# Altium PCB DI_FM.PcbDoc
Units mm, origin at the board's own origin, x right, y up, seen from the top; angles counter-clockwise.
Board outline 51.3 x 49.3 mm, 4 copper layers (Top Layer, GND, Signals, Bottom Layer), stack 0.603 mm thick; 38 components, 42 nets, 242 pads, 34 vias.
Unrouted connection lines stored in the file: 77.
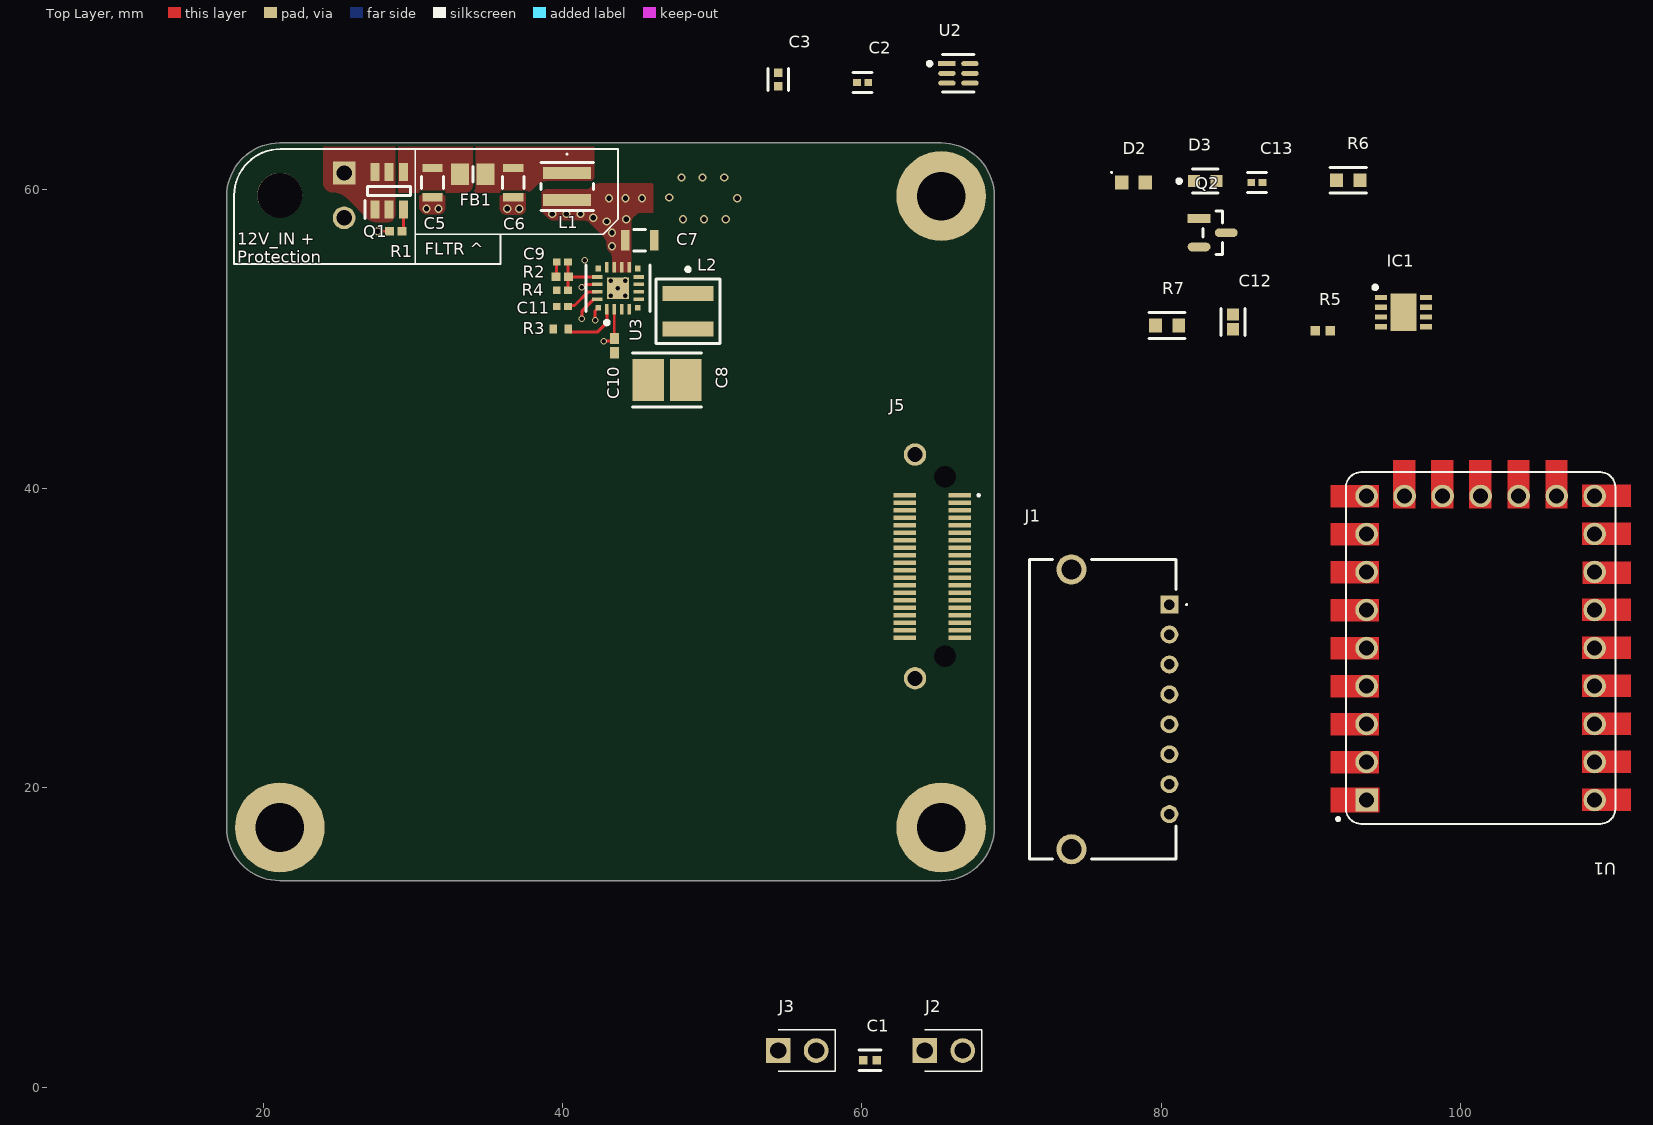
[diagram p0: Top Layer view]
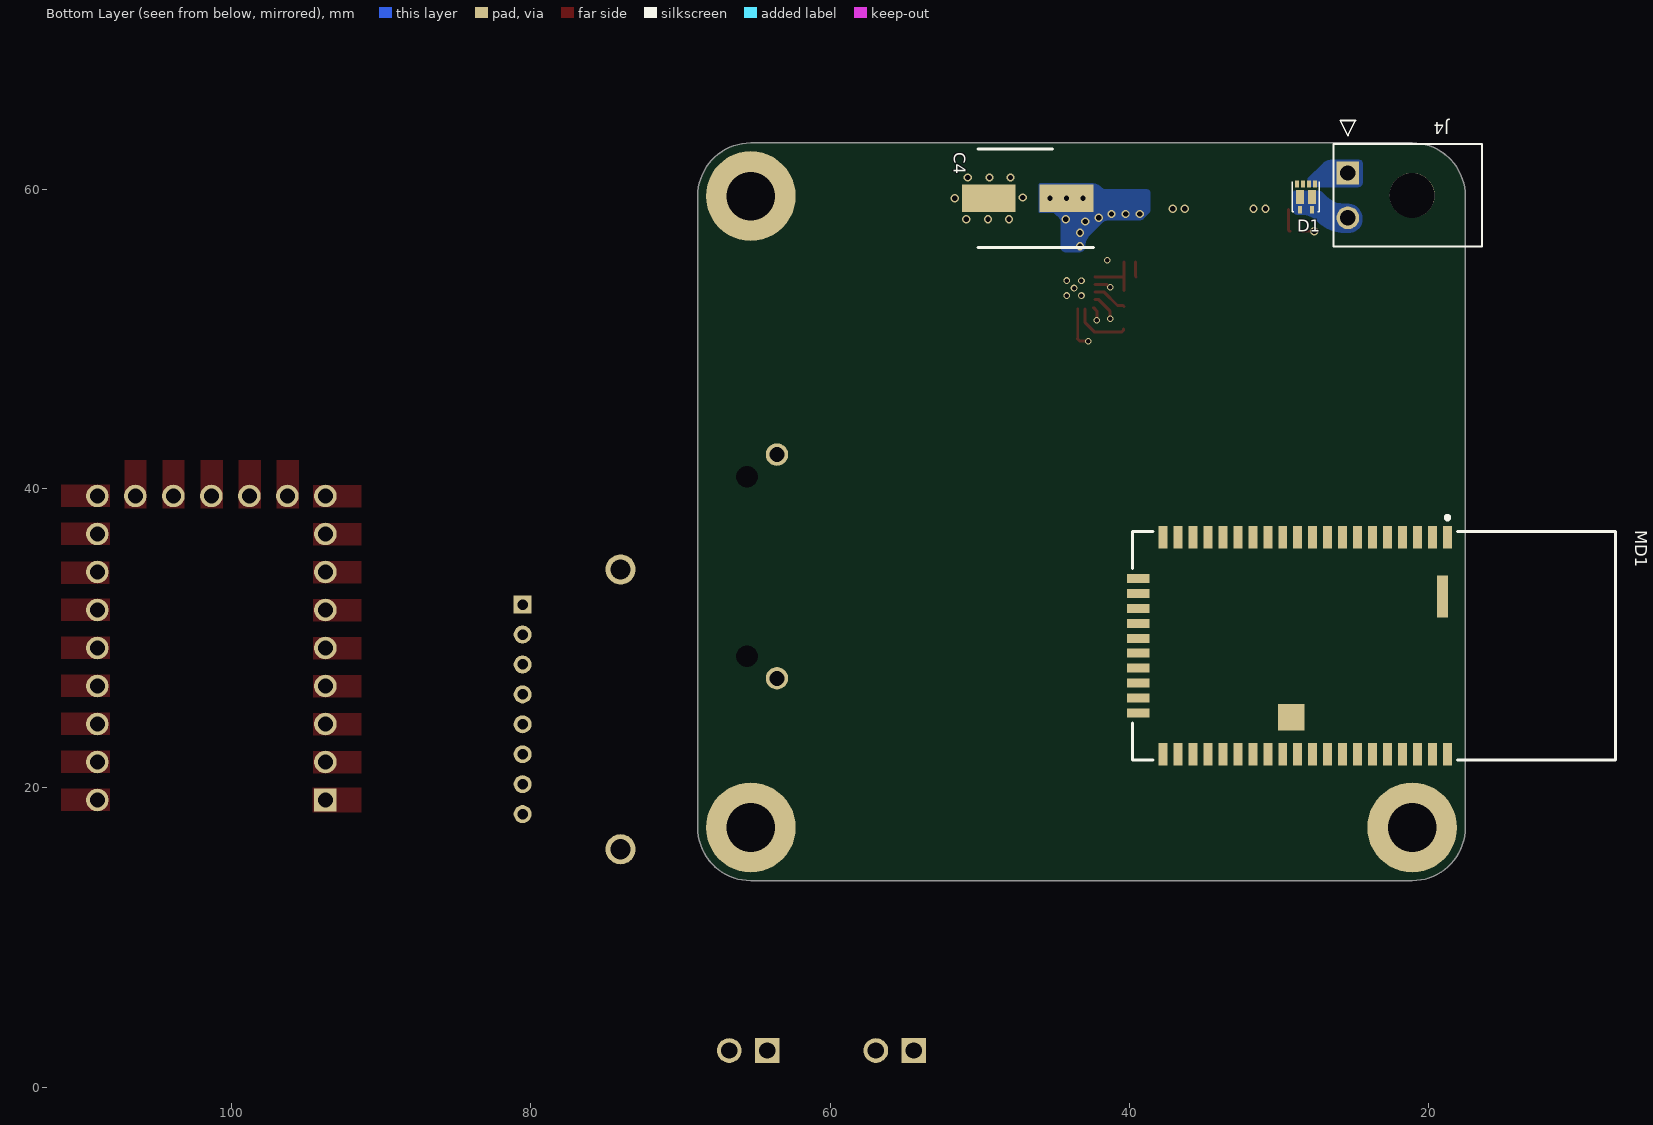
[diagram p1: Bottom Layer view, seen from below]
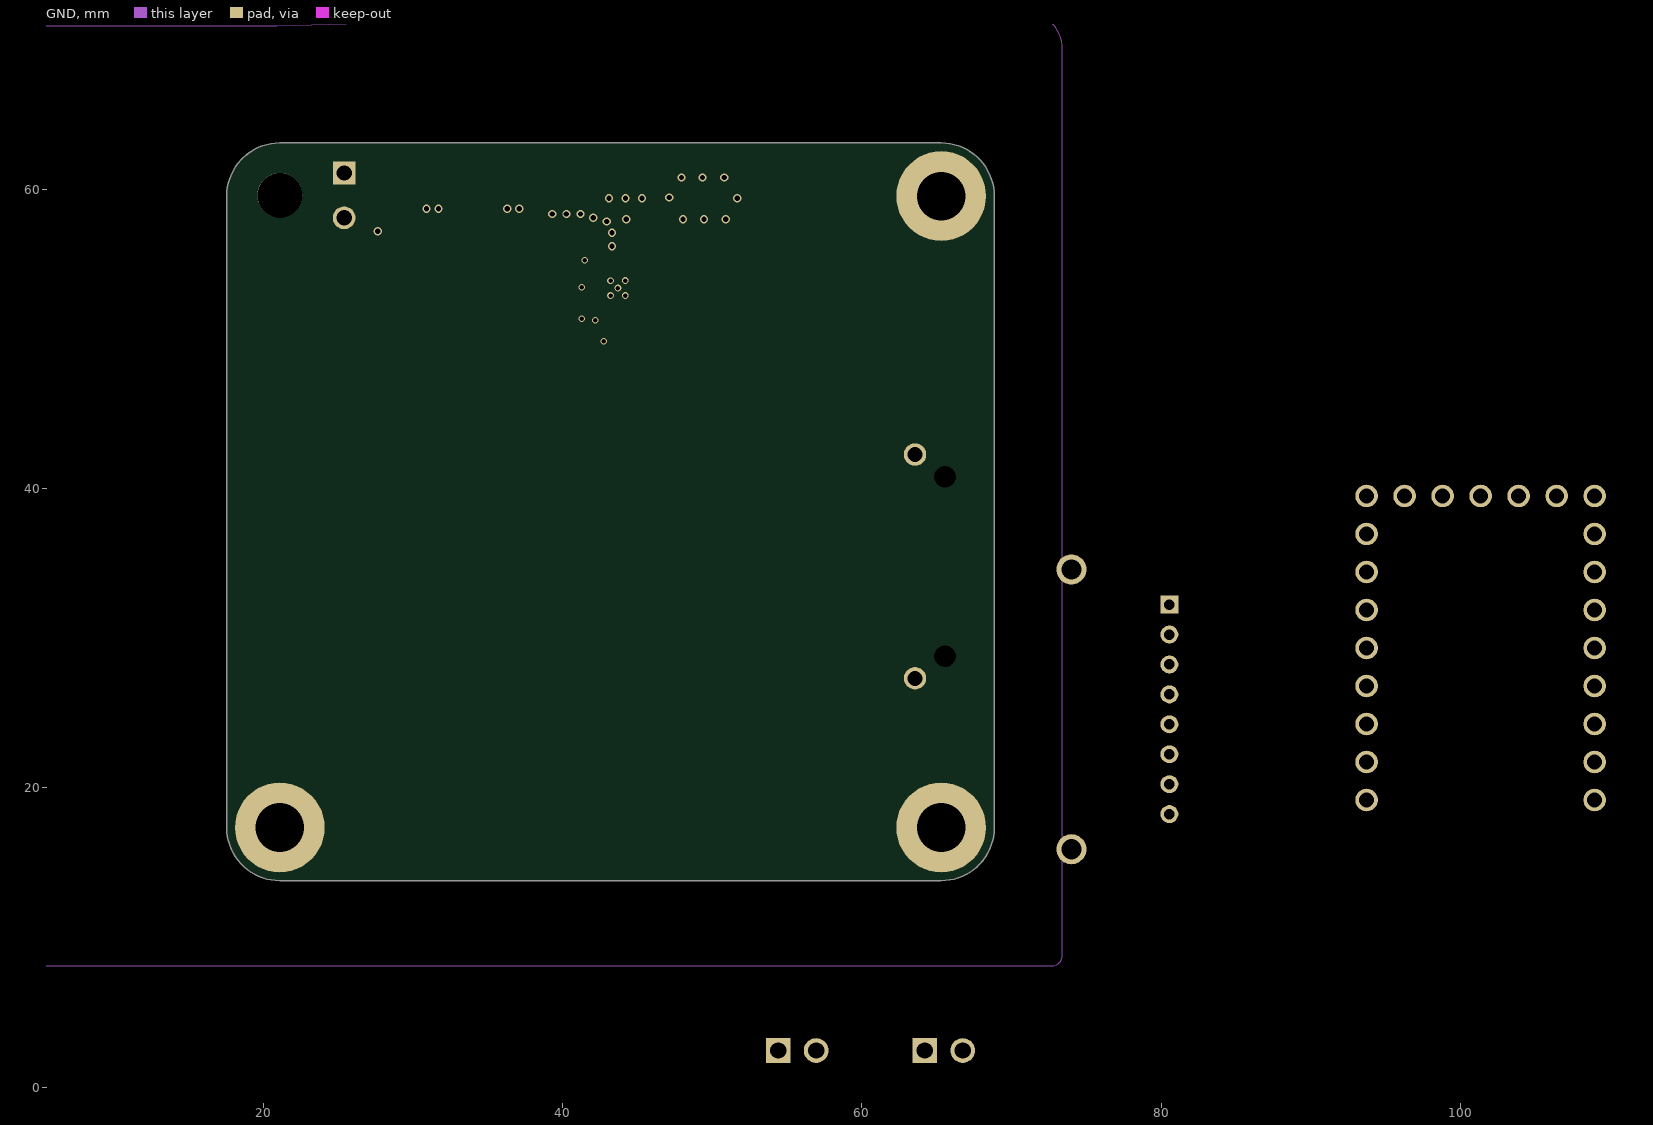
[diagram p2: GND]
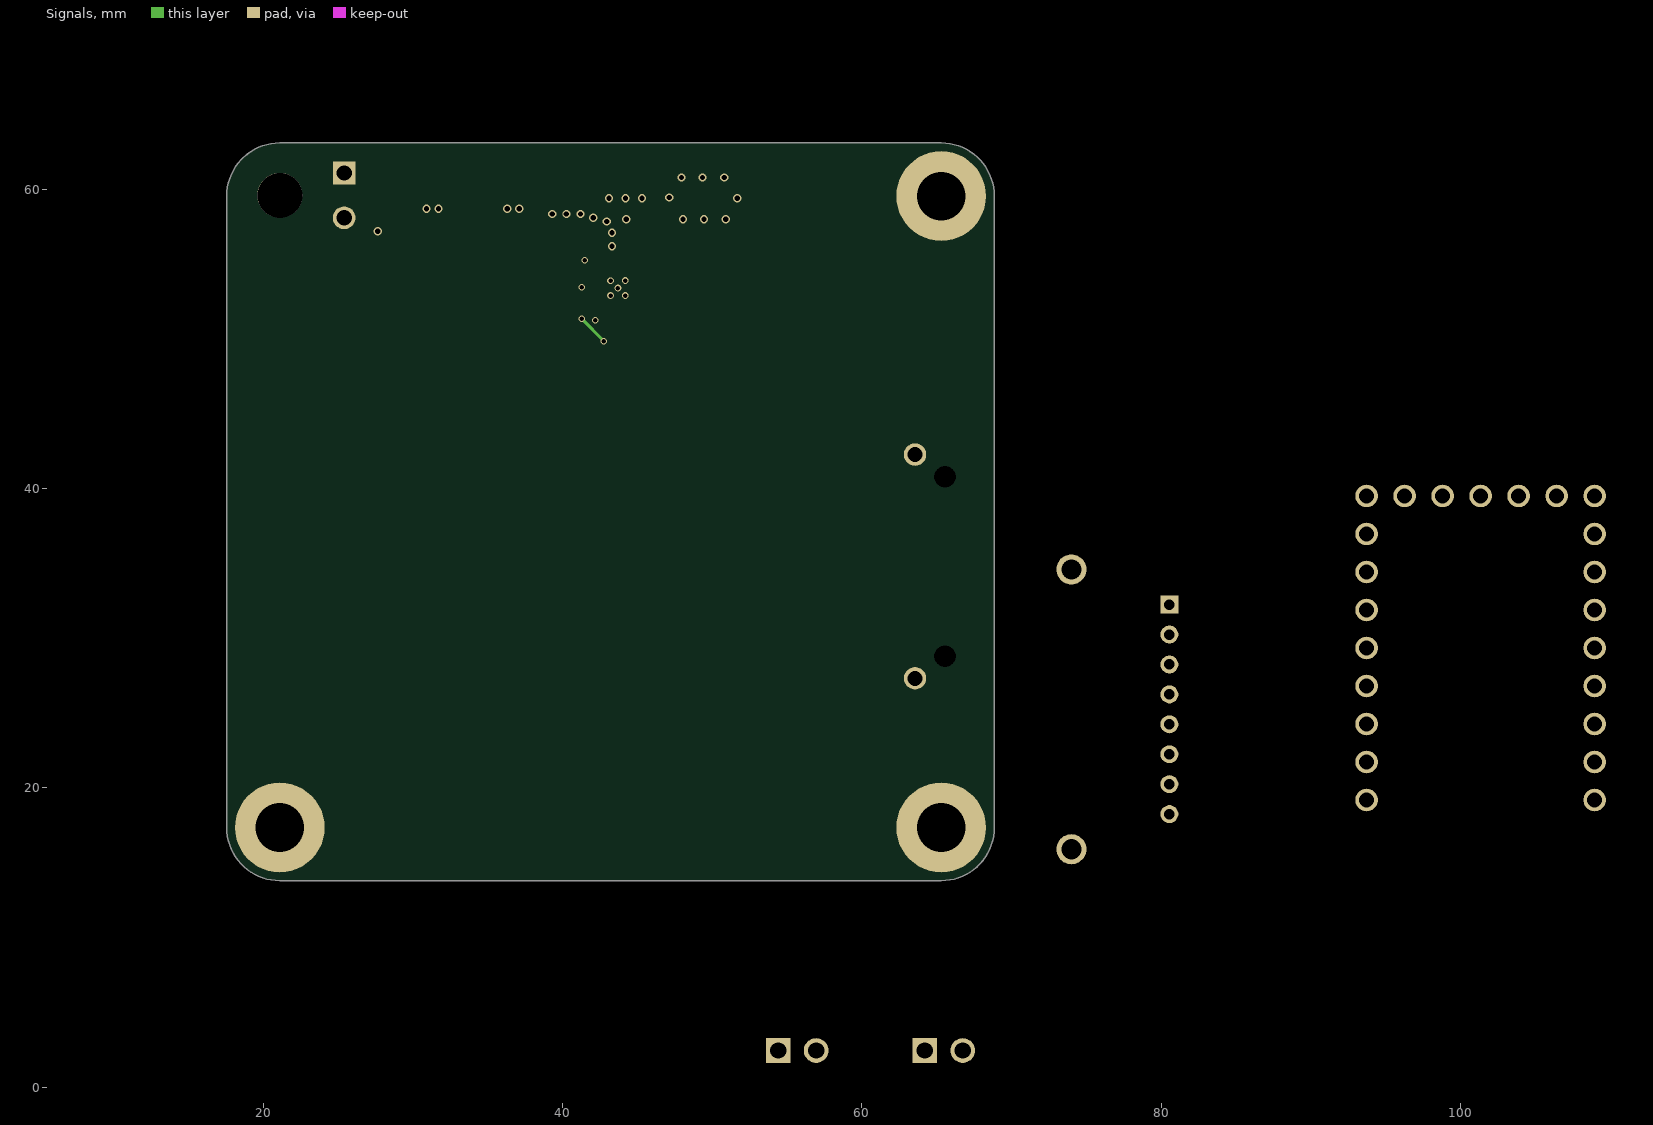
[diagram p3: Signals]

## Layer stack, top to bottom
Top Solder: solder mask 0.0102, Solder Resist, Dk 3.5
Top Layer: signal copper 0.035
Dielectric 2: prepreg 0.0711, PP-006, Dk 4.1
GND: signal copper 0.0356
Dielectric 1: dielectric 0.32, FR-4, Dk 4.8
Signals: signal copper 0.0356
Dielectric 3: prepreg 0.0711, PP-006, Dk 4.1
Bottom Layer: signal copper 0.035
Bottom Solder: solder mask 0.0102, Solder Resist, Dk 3.5

## Board outline
17.55,17.35 17.55,59.55 cw(c21.1,59.55) 21.1,63.1 65.3,63.1 cw(c65.3,59.55) 68.85,59.55 68.85,17.35 cw(c65.3,17.35) 65.3,13.8 21.1,13.8 cw(c21.1,17.35)

## Design rules (kind name [scope] priority, off if disabled: settings)
BoardOutlineClearance [All] p1: gap=0.254 ignorepadtopadclearanceinfootprint=FALSE
Clearance Clearance_2 [InNet('NetFB1_1') vs InNet('HV+')] p1: gap=4 ignorepadtopadclearanceinfootprint=TRUE
Clearance Clearance_1 [InNet('HV-') vs InNet('HV+')] p2: gap=2 ignorepadtopadclearanceinfootprint=TRUE except(1: Arc-SMDPad Track-SMDPad SMDPad-SMDPad THPad-Text THPad-Hole Via-Via Via-Fill Via-Poly Via-Region Via-Text Via-Hole)
Clearance "Stitching SDC" [IsStitchingVia and InNet('SDC') vs (IsVia and (Not IsStitchingVia)) Or IsPad] p3: gap=0.203 ignorepadtopadclearanceinfootprint=FALSE
Clearance "Stitching 5V" [IsStitchingVia and InNet('5V') vs (IsVia and (Not IsStitchingVia)) Or IsPad] p4: gap=0.1 ignorepadtopadclearanceinfootprint=FALSE
Clearance [All] p5: gap=0.2 ignorepadtopadclearanceinfootprint=TRUE
ComponentClearance [All] p1: gap=0 collisioncheckmode=3 verticalgap=0.254 showdistances=FALSE
DiffPairsRouting DiffPairsRouting_2 [InDifferentialPair('ISOSPI')] p1: maxlimit=0.45 minlimit=0.35 mostfreqgap=0.4 toplayer_minwidth=0.306 toplayer_maxwidth=0.327 toplayer_prefwidth=0.318 midlayer1_minwidth=0.306 midlayer1_maxwidth=0.327 midlayer1_prefwidth=0.318 midlayer2_minwidth=0.306 midlayer2_maxwidth=0.327 midlayer2_prefwidth=0.318 bottomlayer_minwidth=0.306 bottomlayer_maxwidth=0.327 bottomlayer_prefwidth=0.318 maxuncoupledlength=10
DiffPairsRouting DiffPairsRouting_1 [InDifferentialPair('USB_D')] p2: maxlimit=0.275 minlimit=0.18 mostfreqgap=0.254 toplayer_maxgap=0.26 toplayer_prefgap=0.2 toplayer_minwidth=0.18 toplayer_maxwidth=0.26 toplayer_prefwidth=0.2 midlayer1_mingap=0.254 midlayer1_maxgap=0.254 midlayer1_minwidth=0.381 midlayer1_maxwidth=0.381 midlayer1_prefwidth=0.381 midlayer2_mingap=0.2 midlayer2_prefgap=0.25 midlayer2_minwidth=0.203 midlayer2_maxwidth=0.235 midlayer2_prefwidth=0.226 bottomlayer_mingap=0.254 bottomlayer_maxgap=0.254 bottomlayer_minwidth=0.381 bottomlayer_maxwidth=0.381 bottomlayer_prefwidth=0.381 maxuncoupledlength=10
DiffPairsRouting [All] p3: maxlimit=0.254 minlimit=0.254 mostfreqgap=0.254 toplayer_minwidth=0.2 toplayer_maxwidth=0.381 toplayer_prefwidth=0.381 midlayer1_minwidth=0.2 midlayer1_maxwidth=0.381 midlayer1_prefwidth=0.381 midlayer2_minwidth=0.2 midlayer2_maxwidth=0.381 midlayer2_prefwidth=0.381 bottomlayer_minwidth=0.2 bottomlayer_maxwidth=0.381 bottomlayer_prefwidth=0.381 maxuncoupledlength=12.7
Height [All] p1: minheight=0 maxheight=100 prefheight=12.7
HoleSize [All] p1: absolutevalues=TRUE maxlimit=6 minlimit=0.2 maxpercent=80.000 minpercent=20.000
MatchedLengths [InDifferentialPair('USB_D')] p1: tolerance=2 checknetsindiffpair=FALSE checkdiffpairvsdiffpair=TRUE checkxsignals=TRUE checkothers=TRUE phasematching=TRUE phasetolerance=0.254 phasedistance=12.7
MinimumSolderMaskSliver [All] p1: minsoldermaskwidth=0.2
NetAntennae [All] p1 off: netantennaetolerance=0
PlaneClearance [All] p1: clearance=0.35
PlaneConnect [All] p1: planeconnectstyle=Relief reliefexpansion=0.508 reliefentries=4 reliefconductorwidth=0.175 reliefairgap=0.1
PolygonConnect PolygonConnect_1 [InNet('GND')] p1: thpad.connectstyle=Relief thpad.reliefconductorwidth=0.254 thpad.reliefentries=4 thpad.polygonreliefangle="90 Angle" thpad.airgapwidth=0.254 smdpad.connectstyle=Direct smdpad.reliefconductorwidth=0.254 smdpad.reliefentries=4 smdpad.polygonreliefangle="90 Angle" smdpad.airgapwidth=0.254 via.connectstyle=Direct via.reliefconductorwidth=0.254 via.reliefentries=4 via.polygonreliefangle="90 Angle" via.airgapwidth=0.254
PolygonConnect [All] p2: connectstyle=Direct reliefconductorwidth=0.2 reliefentries=4 polygonreliefangle="90 Angle" airgapwidth=0.1
RoutingVias [All] p1: holewidth=1.5 width=3 viastyle="Through Hole" minholewidth=0.3 minwidth=0.45 maxholewidth=0.711 maxwidth=1.27
SilkToSilkClearance [All] p1: silktosilkclearance=0
SilkToSolderMaskClearance [IsPad] p1: minsilkscreentomaskgap=0 clearancetoexposedcopper=TRUE
SolderMaskExpansion [All] p1: expansion=0 istentingtop=FALSE
SupplyNets "Schematic Supply Nets_8" [InNet('V_In')] p1: voltage=0.000
SupplyNets "Schematic Supply Nets_1" [InNet('5V')] p2: voltage=0.000
SupplyNets "Schematic Supply Nets_9" [InNet('GND')] p3: voltage=0.000
SupplyNets "Schematic Supply Nets_6" [InNet('3V3')] p4: voltage=0.000
UnRoutedNet [All] p1: checkbadconnections=TRUE
Width PWR_Width [InNetClass('HI_CURRENT')] p1: maxlimit=4 minlimit=0.254 preferedwidth=3
Width [All] p2: maxlimit=3 minlimit=0.15 preferedwidth=0.2
19 further rules are at their usual default settings.

## Classes and differential pairs
component class MCU: C4 C8 U1 U2
component class DIG_PDU: C4 C5 C6 C7 C8 C9 C10 C12 C13 D1 D2 D3 FB1 IC1 J4 L1 L2 Q1 Q2 R1 R2 R3 R5 R6 U3
component class ConnectorInterface: J5
component class BM83: C1 J1 J2 J3 MD1

## Components (designator, comment, footprint, x,y, rotation, side; value= is the part's Value field where it differs from the comment)
C1 "0.1uF" FP-CC0402-IPC_B 60.55,1.8 r0 top
C2 "1uF" FP-GRM155-0_1-IPC_C 60.05,67.15 r0 top
C3 "0.1uF" FP-CC0402-IPC_B 54.4,67.35 r90 top
C4 "HHXC500ARA330MF80G" CAPAE660X800N 46.8,59.4 r0 bottom
C5 "4.7uF" FP-CGA4J-IPC_C 31.3,60.45 r270 top
C6 "4.7uF" FP-CGA4J-IPC_C 36.694,60.45 r270 top
C7 "4.7uF" FP-CGA4J-IPC_C 45.15,56.6 r0 top
C8 "GRM32ER71A476ME15L" FP-GRM32E-0_3-0_2-IPC_A 46.977,47.257 r180 top
C9 "10pF" FP-GCM155-0_05-IPC_C 39.977,55.157 r180 top
C10 "1uF" FP-GRT155-0_1-IPC_A 43.477,49.557 r270 top
C11 "10nF" FP-GCM155-0_05-IPC_C 39.977,52.177 r180 top
C12 "10uF" FP-GRM155-0_2-IPC_A 84.8,51.15 r90 top
C13 "1uF" FP-GRM155-0_1-IPC_C 86.4,60.45 r0 top
D1 "NSPU5201" NSPM5131MUTBG 28.2,59.5 r0 bottom
D2 "RED LED" DIOC1608X05N 78.15,60.45 r0 top
D3 "Blue LED" 0603-LED-1 82.95,60.55 r0 top
FB1 "MPZ2012S601ATD25" BEADC2012X105N 34,61 r0 top
IC1 "NCV8187AMLE330TCG" SON65P300X300X100-9N-D 96.2,51.8 r0 top
J1 "2200301081" 2200301081 80.55,32.25 r90 top
J2 "2Pin" "2 Pin Male" 64.2,2.45 r0 top
J3 "2Pin" "2 Pin Male" 54.4,2.45 r0 top
J4 "215760-1002" 215760-1002-Footprint-1 21.082,59.449 r90 bottom
J5 "LSHM-120-04.0-L-DV-A-S-K-TR" LSHM-120-XX.X-YYY-DV-A-S-K-TR 64.7,34.8 r90 top
L1 "XGL3520-472MEC" XGL3520472MEC 40.3,60.2 r270 top
L2 "XGL4020-222MEC" FP-XGL4020-MFG 48.377,51.857 r270 top
MD1 "BM83SM1-00AB" FP-BM83SM1-00AB-MFG 23.65,29.5 r270 bottom
Q1 "FDC610PZ" SOT95P280X110-6N 28.4,59.9 r90 top
Q2 "BSS138" FP-318-08-IPC_B 83.44,57.1 r0 top
R1 "5k 0402" Res0402-Type-1 28.85,57.2 r0 top
R2 "1M" RESC1005X40X25NL05T10 39.977,54.157 r180 top
R3 "18.2k" WRIS-RSKS_0402 1309.877,1320.657 r0 top
R4 "182k" FP-AC0402-IPC_C 39.977,53.257 r0 top
R5 "10k" RESC1005X40X25ML05T05 90.8,50.55 r0 top
R6 "1k 1%" Res0603-type-1 92.5,60.6 r0 top
R7 "1k 1%" Res0603-type-1 80.4,50.9 r0 top
U1 "RP2040-ZERO" MODULE_RP2040-ZERO 101.35,29.35 r180 top
U2 "LM66100DCKT" FP-DCK0006A-IPC_C 66.45,67.75 r0 top
U3 "LT8609SIV#PBF" FP-LQFN-16-05-08-1516-MFG 43.7,53.4 r90 top

## Footprints (in the part's own frame and the unit in brackets; to place one, negate y for a bottom-side part, rotate by r counter-clockwise, add the part's x,y. Pads: shape width x height; smd on the part's side, far side on the other; paste and mask are expansions set on the pad)
"2 Pin Male" [mm]
  rect 1.65x1.65 hole 1.1: 1(0,0)
  round 1.65 hole 1.1: 2(2.54,0)
  silkscreen extent 0,-1.4 3.81,1.4
0603-LED-1 [mm]
  rect 0.8x0.8 smd paste+0 mask+0: 1(-0.75,0) 2(0.75,0)
  silkscreen extent -1.87,-0.8 0.85,0.8, body extent -1.25,-0.55 1.25,0.55, height 0.25
215760-1002-Footprint-1 [mm]
  rect 1.52x1.52 hole 1.02: 1(1.651,4.318)
  round 1.52 hole 1.02: 2(-1.349,4.318)
  round 3 hole 3 unplated: 3(0.151,0.018)
  silkscreen extent -3.27,-4.64 5.15,5.27, body extent -3.3,-4.57 3.55,5.34, height 5.94
2200301081 [mm]
  rect 1.2x1.2 hole 0.7: 1(0,0)
  round 1.2 hole 0.7: 2(-2,0) 3(-4,0) 4(-6,0) 5(-8,0) 6(-10,0) 7(-12,0) 8(-14,0)
  round 2.01 hole 1.34: MH1(2.35,6.55) MH2(-16.35,6.55)
  silkscreen extent -17,-1.2 3,9.35, body extent -17,-0.45 3,9.35, height 7.01
BEADC2012X105N [mm]
  rect 1.2x1.45 smd: 1(-0.85,0) 2(0.85,0)
  silkscreen extent 0,-0.53 0,0.53, body extent -1,-0.63 1,0.63, height 1.05
CAPAE660X800N [mm]
  rect 3.6x1.85 smd: 1(-2.6,0) 2(2.6,0)
  silkscreen extent -4.4,-3.3 3.3,3.3, body extent -3.7,-3.4 3.7,3.4, height 8
DIOC1608X05N [mm] "Chip Diode, 2-Leads, Body 1.63x0.80mm, IPC Medium Density"
  rect 0.9x0.95 smd: 1(-0.8,0) 2(0.8,0)
  silkscreen extent -1.51,0.64 -1.41,0.74, body extent -0.87,-0.45 0.87,0.45, height 0.5
FP-318-08-IPC_B [mm]
  rect 1.524x0.578 smd paste+0 mask+0: 1(-0.91,0.95)
  rrect100% 1.524x0.578 smd paste+0 mask+0: 2(-0.91,-0.95) 3(0.91,0)
  silkscreen extent -0.65,-1.45 0.65,1.45, body extent -1.92,-1.7 1.92,1.7, height 0.25
FP-AC0402-IPC_C [mm]
  rect 0.515x0.472 smd paste+0 mask+0: 1(-0.379,0) 2(0.379,0)
  body extent -0.74,-0.38 0.74,0.38, height 0.25
FP-BM83SM1-00AB-MFG [mm]
  rect 1.5x0.6 smd paste+0 mask+0: 1(-7.25,4.9) 2(-7.25,3.9) 3(-7.25,2.9) 4(-7.25,1.9) 5(-7.25,0.9) 6(-7.25,-0.1) 7(-7.25,-1.1) 8(-7.25,-2.1) 9(-7.25,-3.1) 10(-7.25,-4.1) 11(-7.25,-5.1) 12(-7.25,-6.1) 13(-7.25,-7.1) 14(-7.25,-8.1) 15(-7.25,-9.1) 16(-7.25,-10.1) 17(-7.25,-11.1) 18(-7.25,-12.1) 19(-7.25,-13.1) 20(-7.25,-14.1) 31(7.25,-14.1) 32(7.25,-13.1) 33(7.25,-12.1) 34(7.25,-11.1) 35(7.25,-10.1) 36(7.25,-9.1) 37(7.25,-8.1) 38(7.25,-7.1) 39(7.25,-6.1) 40(7.25,-5.1) 41(7.25,-4.1) 42(7.25,-3.1) 43(7.25,-2.1) 44(7.25,-1.1) 45(7.25,-0.1) 46(7.25,0.9) 47(7.25,1.9) 48(7.25,2.9) 49(7.25,3.9) 50(7.25,4.9)
  rect 0.6x1.5 smd paste+0 mask+0: 21(-4.5,-15.75) 22(-3.5,-15.75) 23(-2.5,-15.75) 24(-1.5,-15.75) 25(-0.5,-15.75) 26(0.5,-15.75) 27(1.5,-15.75) 28(2.5,-15.75) 29(3.5,-15.75) 30(4.5,-15.75)
  rect 1.78x1.78 smd paste+0 mask+0: 56(4.77,-5.53)
  rect 2.79x0.76 smd paste+0 mask+0: 57(-3.29,4.58)
  silkscreen extent -8.68,-16.12 7.63,16.12, body extent -7.5,-16 7.5,16, height 2.5
FP-CC0402-IPC_B [mm]
  rect 0.568x0.572 smd paste+0 mask+0: 1(-0.452,0) 2(0.452,0)
  silkscreen extent -0.74,-0.69 0.74,0.69, body extent -0.89,-0.44 0.89,0.44, height 0.25
FP-CGA4J-IPC_C [mm]
  rect 0.556x1.356 smd paste+0 mask+0: 1(-0.975,0) 2(0.975,0)
  silkscreen extent -0.4,-0.72 0.4,0.72, body extent -1.35,-0.82 1.35,0.82, height 0.25
FP-DCK0006A-IPC_C [mm]
  rect 1.164x0.336 smd paste+0 mask+0: 1(-0.77,0.65)
  rrect100% 1.164x0.336 smd paste+0 mask+0: 2(-0.77,0) 3(-0.77,-0.65) 4(0.77,-0.65) 5(0.77,0) 6(0.77,0.65)
  silkscreen extent -2.05,-1.25 1.05,1.25
FP-GCM155-0_05-IPC_C [mm]
  rect 0.515x0.472 smd paste+0 mask+0: 1(-0.379,0) 2(0.379,0)
  body extent -0.74,-0.38 0.74,0.38, height 0.25
FP-GRM32E-0_3-0_2-IPC_A [mm]
  rect 2.103x2.806 smd paste+0 mask+0: 1(-1.251,0) 2(1.251,0)
  silkscreen extent -2.3,-1.8 2.3,1.8, body extent -2.8,-1.9 2.8,1.9, height 0.25
FP-GRM155-0_1-IPC_C [mm]
  rect 0.515x0.472 smd paste+0 mask+0: 1(-0.379,0) 2(0.379,0)
  silkscreen extent -0.64,-0.67 0.64,0.67, body extent -0.74,-0.38 0.74,0.38, height 0.25
FP-GRM155-0_2-IPC_A [mm]
  rect 0.828x0.806 smd paste+0 mask+0: 1(-0.489,0) 2(0.489,0)
  silkscreen extent -0.9,-0.8 0.9,0.8, body extent -1.1,-0.6 1.1,0.6, height 0.25
FP-GRT155-0_1-IPC_A [mm]
  rect 0.76x0.6 smd paste+0 mask+0: 1(-0.476,0) 2(0.476,0)
  body extent -1.06,-0.56 1.06,0.56, height 0.25
FP-LQFN-16-05-08-1516-MFG [mm]
  rect 0.7x0.25 smd paste+0 mask+0: 1(-1.4,0.75) 2(-1.4,0.25) 3(-1.4,-0.25) 4(-1.4,-0.75) 9(1.4,-0.75) 10(1.4,-0.25) 11(1.4,0.25) 12(1.4,0.75)
  rect 0.25x0.7 smd paste+0 mask+0: 5(-0.75,-1.4) 6(-0.25,-1.4) 7(0.25,-1.4) 8(0.75,-1.4) 13(0.75,1.4) 14(0.25,1.4) 15(-0.25,1.4) 16(-0.75,1.4)
  rect 1.45x1.45 smd paste+0 mask+0: 17(0,0)
  rect 0.375x0.375 smd paste+0 mask+0: 18(-1.312,1.312) 19(1.312,1.312) 20(-1.312,-1.312) 21(1.312,-1.312)
  silkscreen extent -2.42,-2.14 1.55,2.12, body extent -1.85,-1.85 1.85,1.85, height 0.25
FP-XGL4020-MFG [mm]
  rect 0.98x3.4 smd paste+0 mask+0: 1(-1.185,0) 2(1.185,0)
  silkscreen extent -2.92,-2.15 2.15,2.15, body extent -2.25,-2.25 2.25,2.25, height 0.25
LSHM-120-XX.X-YYY-DV-A-S-K-TR [mm]
  rect 0.3x1.5 smd: 1(4.75,-1.85) 2(4.75,1.85) 3(4.25,-1.85) 4(4.25,1.85) 5(3.75,-1.85) 6(3.75,1.85) 7(3.25,-1.85) 8(3.25,1.85) 9(2.75,-1.85) 10(2.75,1.85) 11(2.25,-1.85) 12(2.25,1.85) 13(1.75,-1.85) 14(1.75,1.85) 15(1.25,-1.85) 16(1.25,1.85) 17(0.75,-1.85) 18(0.75,1.85) 19(0.25,-1.85) 20(0.25,1.85) 21(-0.25,-1.85) 22(-0.25,1.85) 23(-0.75,-1.85) 24(-0.75,1.85) 25(-1.25,-1.85) 26(-1.25,1.85) 27(-1.75,-1.85) 28(-1.75,1.85) 29(-2.25,-1.85) 30(-2.25,1.85) 31(-2.75,-1.85) 32(-2.75,1.85) 33(-3.25,-1.85) 34(-3.25,1.85) 35(-3.75,-1.85) 36(-3.75,1.85) 37(-4.25,-1.85) 38(-4.25,1.85) 39(-4.75,-1.85) 40(-4.75,1.85)
  round 0.725 hole 1.45 unplated: 41(6,-0.85) 42(-6,-0.85)
  round 1.5 hole 1: 43(7.475,1.15) 44(-7.475,1.15)
  silkscreen extent 4.7,-3.15 4.8,-3.05, body extent -7.9,-2.52 7.9,2.51, height 3.94
MODULE_RP2040-ZERO [mm]
  rect 1.508x1.508 / inner round 1.508 / far side rect 1.508x1.508 hole 1: 1(7.62,10.16)
  round 1.508 hole 1: 2(7.62,7.62) 3(7.62,5.08) 4(7.62,2.54) 5(7.62,0) 6(7.62,-2.54) 7(7.62,-5.08) 8(7.62,-7.62) 9(7.62,-10.16) 10(5.08,-10.16) 11(2.54,-10.16) 12(0,-10.16) 13(-2.54,-10.16) 14(-5.08,-10.16) 15(-7.62,-10.16) 16(-7.62,-7.62) 17(-7.62,-5.08) 18(-7.62,-2.54) 19(-7.62,0) 20(-7.62,2.54) 21(-7.62,5.08) 22(-7.62,7.62) 23(-7.62,10.16)
  Top Layer region: -10.033,6.858 -6.783,6.858 -6.783,8.358 -10.033,8.358
  Top Layer region: 10.019,11.009 6.769,11.009 6.769,9.309 10.019,9.309
  Top Layer region: -10.033,9.398 -6.783,9.398 -6.783,10.898 -10.033,10.898
  Top Layer region: -10.033,4.318 -6.783,4.318 -6.783,5.818 -10.033,5.818
  Top Layer region: -10.033,1.778 -6.783,1.778 -6.783,3.278 -10.033,3.278
  Top Layer region: -10.033,-0.762 -6.783,-0.762 -6.783,0.738 -10.033,0.738
  Top Layer region: -10.033,-3.302 -6.783,-3.302 -6.783,-1.802 -10.033,-1.802
  Top Layer region: -10.044,-5.784 -6.794,-5.784 -6.794,-4.284 -10.044,-4.284
  Top Layer region: -10.033,-8.382 -6.783,-8.382 -6.783,-6.882 -10.033,-6.882
  Top Layer region: -10.033,-10.922 -6.783,-10.922 -6.783,-9.422 -10.033,-9.422
  Top Layer region: 10.033,-6.858 6.783,-6.858 6.783,-8.358 10.033,-8.358
  Top Layer region: 10.033,-4.318 6.783,-4.318 6.783,-5.818 10.033,-5.818
  Top Layer region: 10.033,-1.778 6.783,-1.778 6.783,-3.278 10.033,-3.278
  Top Layer region: 10.033,0.762 6.783,0.762 6.783,-0.738 10.033,-0.738
  Top Layer region: 10.033,3.302 6.783,3.302 6.783,1.802 10.033,1.802
  Top Layer region: 10.033,5.842 6.783,5.842 6.783,4.342 10.033,4.342
  Top Layer region: 10.033,8.382 6.783,8.382 6.783,6.882 10.033,6.882
  Top Layer region: 10.033,-9.398 6.783,-9.398 6.783,-10.898 10.033,-10.898
  Top Layer region: -4.318,-12.573 -4.318,-9.323 -5.818,-9.323 -5.818,-12.573
  Top Layer region: -1.778,-12.573 -1.778,-9.323 -3.278,-9.323 -3.278,-12.573
  Top Layer region: 0.762,-12.573 0.762,-9.323 -0.738,-9.323 -0.738,-12.573
  Top Layer region: 3.302,-12.573 3.302,-9.323 1.802,-9.323 1.802,-12.573
  Top Layer region: 5.842,-12.573 5.842,-9.323 4.342,-9.323 4.342,-12.573
  silkscreen extent -9,-11.75 9.62,11.75, body extent -9,-11.75 9,12.95, height 4.35
NSPM5131MUTBG [mm]
  rect 0.25x0.48 smd: 1(-0.6,-0.86) 2(-0.2,-0.86) 3(0.2,-0.86) 4(0.6,-0.86) 5(0.4,0.86) 6(-0.4,0.86)
  rect 0.55x0.94 smd: 7(0.4,0) 8(-0.4,0)
  silkscreen extent -0.9,-1 0.9,1, body extent -0.9,-1.02 0.9,1.02, height 0.51
Res0402-Type-1 [mm] "Chip Resistor, 2-Leads, Body 1.00x0.50mm, IPC Medium Density"
  rect 0.6x0.55 smd: 1(-0.425,0) 2(0.425,0)
  body extent -0.53,-0.28 0.53,0.28, height 0.4
Res0603-type-1 [mm]
  rect 0.859x0.912 smd paste+0 mask+0: 1(-0.777,0) 2(0.777,0)
  silkscreen extent -1.21,-0.86 1.21,0.86, body extent -1.46,-0.71 1.46,0.71, height 0.25
RESC1005X40X25ML05T05 [mm] "Chip Resistor, 2-Leads, Body 1.00x0.50mm, IPC Low Density"
  rect 0.65x0.65 smd: 1(-0.5,0) 2(0.5,0)
  body extent -0.53,-0.27 0.53,0.28, height 0.4
RESC1005X40X25NL05T10 [mm] "Chip Resistor, 2-Leads, Body 1.00x0.50mm, IPC Medium Density"
  rect 0.6x0.55 smd: 1(-0.425,0) 2(0.425,0)
  body extent -0.53,-0.27 0.53,0.28, height 0.4
SON65P300X300X100-9N-D [mm]
  rect 0.8x0.35 smd: 1(-1.5,0.975) 2(-1.5,0.325) 3(-1.5,-0.325) 4(-1.5,-0.975) 5(1.5,-0.975) 6(1.5,-0.325) 7(1.5,0.325) 8(1.5,0.975)
  rect 1.75x2.5 smd: 9(0,0)
  silkscreen extent -2.02,1.53 -1.77,1.77, body extent -1.55,-1.5 1.55,1.5, height 1
SOT95P280X110-6N [mm]
  rect 1.2x0.6 smd: 1(-1.25,0.95) 2(-1.25,0) 3(-1.25,-0.95) 4(1.25,-0.95) 5(1.25,0) 6(1.25,0.95)
  silkscreen extent -1.85,-1.45 0.3,1.6, body extent -1.4,-1.45 1.4,1.45, height 1.1
WRIS-RSKS_0402 [mm] "Fixed Thick Film, body 1.00 x 0.50 mm"
  rect 0.5x0.6 smd: 1(-1270.5,-1270) 2(-1269.5,-1270)
  body extent -1270.5,-1270.25 -1269.5,-1269.75, height 0.35
XGL3520472MEC [mm]
  rect 0.81x3.2 smd: 1(-0.9,0) 2(0.9,0)
  silkscreen extent -2.2,-1.75 1.6,1.75, body extent -1.6,-1.75 1.6,1.75, height 2.1

## Part data
C1 C3: library part CMP-Cap-00006-1, "Ceramic Capacitor, Multilayer, Ceramic, 16V, 10% +Tol, 10% -Tol, X7R, 15% TC, 0.1uF, Surface Mount, 0402", Capacitance=100nF, Dielectric=XR7, Tolerance=10%, Voltage Rating=16V
C2 C13: library part CMP-06035-028020-1, "Chip Multilayer Ceramic Capacitors for General Purpose, 0402, 1.0uF, X7R, 15%, 10%, 10V /  / GRM155Z71A105KE01D"
C4: "Capacitor Polarised", Manufacturer_Name=Chemi-Con, Mouser Part Number=661-HHXC500A330MF80G, Arrow Part Number=HHXC500ARA330MF80G, Arrow Price/Stock=null?utm_currency=USD&region=nac, Datasheet Link=https://www.digikey.com/en/products/detail/chemi-con/HHXC500ARA330MF80G/6928175, Height=8mm, Manufacturer_Part_Number=HHXC500ARA330MF80G, Mouser Price/Stock=https://www.mouser.co.uk/ProductDetail/Chemi-Con/HHXC500ARA330MF80G?qs=u4fy%2FsgLU9MsXjhGLyQcVQ%3D%3D
C5 C6 C7: library part CMP-08246-000171-1, "Cap Ceramic 4.7uF 50V X7R 10% Pad SMD 0805 +125°C Automotive T/R"
C8: library part CMP-2000-06363-3, "Chip Multilayer Ceramic Capacitors for General Purpose, 1210, 47uF, X7R, 15%, 20%, 10V", Capacitance=47uF, Case Code (Imperial)=1210, Case Code (Metric)=3225, Dielectric=X7R, Max Operating Temperature=125°C, Min Operating Temperature=-55°C, Package Quantity=1, Tolerance=20%, Voltage=10V, Case/Package=1210, Depth=2.5mm, Height=2.5mm, Lead Free="Lead Free", Length=3.2mm, Mount="Surface Mount", Packaging="Tape and Reel", Radiation Hardening=No, REACH SVHC="No SVHC", Termination=SMD/SMT, Thickness=0.106inch, Voltage Rating=10V, Voltage Rating (DC)=10V, Width=0.098inch
C9: library part CMP-06035-039712-1, "Ceramic Capacitor for Automotive 10pF ±5% 50VDC C0G 0402 Paper T/R", Case Code (Imperial)=0402, Case Code (Metric)=1005, Dielectric=C0G, Max Operating Temperature=125°C, Min Operating Temperature=-55°C, Package Quantity=10000, Ratings=AEC-Q200, Tolerance=5%, Voltage Rating=50V, Capacitance=10pF, Case/Package=0402, Height=0.5mm, Lead Free="Lead Free", Length=0.039inch, Mount="Surface Mount", Packaging="Tape and Reel", REACH SVHC="No SVHC", Termination=SMD/SMT, Thickness=0.022inch, Voltage Rating (DC)=50V, Weight=0.000212oz, Width=0.02inch
C10: library part CMP-06035-047663-1, "Multi-Layer Ceramic Capacitor 1uF 25V X6S ±10% 0402 Paper T/R /  / GRT155C81E105KE13D"
C11: library part CMP-2008-03723-3, "Ceramic Capacitor for Automotive 10nF ±10% 50VDC X7R 0402 Paper T/R /  / GCM155R71H103KA55D", Case Code (Imperial)=0402, Case Code (Metric)=1005, Dielectric=X7R, Max Operating Temperature=125°C, Min Operating Temperature=-55°C, Package Quantity=1, Ratings=AEC-Q200, Tolerance=10%, Voltage=50V, Capacitance=10nF, Case/Package=0402, Depth=0.5mm, Height=0.5mm, Lead Free="Lead Free", Length=1mm, Mount="Surface Mount", Packaging="Tape and Reel", Radiation Hardening=No, REACH SVHC="No SVHC", Termination=SMD/SMT, Thickness=0.022inch, Voltage Rating=50V, Voltage Rating (DC)=50V, Width=0.02inch
C12: library part CMP-06035-061139-1, "Chip Multilayer Ceramic Capacitors for General Purpose, 0402, 10uF, X5R, 15%, 20%, 6.3V"
D1: library part CMP-004-000061-2, "Unidirectional High Voltage ESD and Surge Protection; Provides ESD Protection to IEC6100042 Level 4: +/-30 kV Contact Discharge; Small Package: 1.8 mm x 2.0 mm; These Devices are PbFree", Arrow Part Number=NSPU5201MUTBG, Manufacturer_Name=onsemi, Mouser Part Number=863-NSPU5201MUTBG, Arrow Price/Stock=https://www.arrow.com/en/products/nspu5201mutbg/on-semiconductor, Datasheet Link=https://www.onsemi.com/pub/Collateral/NSPU5201-D.PDF, Design Item ID=NSPU5201MUTBG, Height=0mm, Manufacturer_Part_Number=NSPU5201MUTBG, Mouser Price/Stock=https://www.mouser.co.uk/ProductDetail/ON-Semiconductor/NSPU5201MUTBG?qs=byeeYqUIh0OtIrNH4%2Fsnzg%3D%3D, Source=SamacSys.SchLib
D2: library part CMP-221-0013-1, "0603 Red SMD Led", Datasheet=https://www.aopled.com/AOP_PDFs/L196L-LIC.pdf
D3: library part CMP-LED-0000-10, "Single Color LED, Blue, Water Clear, 1.1mm", Case Code (Imperial)=0603, Case Code (Metric)=1608, Color=Blue, Forward Current=20mA, Forward Voltage=3.8V, Lens Color=Colorless, Max Operating Temperature=80°C, Max Power Dissipation=75mW, Min Operating Temperature=-20°C, Package Quantity=1, Power Dissipation=76mW, Reverse Voltage=5V, Case/Package=0603, Depth=1.6mm, Dominant Wavelength=475nm, Height=0.55mm, Illumination Color=Blue, Lead Free="Lead Free", Length=0.8mm, Lens Style=Diffused,Colorless,Clear,Rectangular, Lens Transparency=Clear, Luminous Intensity=180mcd, Mount="Surface Mount", Number of Elements=1, Number of LEDs=1, Number of Pins=2, Packaging="Tape and Reel", Radiation Hardening=No, Test Current=20mA, Viewing Angle=130°, Wavelength=468nm, Width=0.8mm
FB1: library part CMP-002-000016-2, "Ferrite Beads Multi-Layer Power 600Ohm 25% 100MHz 2A 100mOhm DCR 0805 Automotive T/R", Manufacturer_Name=TDK, Mouser Part Number=810-MPZ2012S601ATD25, Arrow Part Number=MPZ2012S601ATD25, Arrow Price/Stock=https://www.arrow.com/en/products/mpz2012s601atd25/tdk.html?utm_currency=USD&region=europe, Datasheet Link=https://product.tdk.com/system/files/dam/doc/product/emc/emc/beads/catalog/beads_automotive_power_mpz2012_en.pdf, Design Item ID=MPZ2012S601ATD25, Height=1.05mm, Manufacturer_Part_Number=MPZ2012S601ATD25, Mouser Price/Stock=https://www.mouser.co.uk/ProductDetail/TDK/MPZ2012S601ATD25?qs=n0%2F4YYxsltT7vo9AjVUU7w%3D%3D, Source=SamacSys.SchLib
IC1: "Integrated Circuit", Manufacturer_Name=onsemi, Mouser Part Number=863-CV8187AMLE330TCG, Arrow Part Number=NCV8187AMLE330TCG, Arrow Price/Stock=https://www.arrow.com/en/products/ncv8187amle330tcg/on-semiconductor?region=nac, Datasheet Link=https://www.onsemi.com/pub/Collateral/NCV8187-D.PDF, Height=1mm, Manufacturer_Part_Number=NCV8187AMLE330TCG, Mouser Price/Stock=https://www.mouser.co.uk/ProductDetail/onsemi/NCV8187AMLE330TCG?qs=HBWAp0VN4RhK8HbhfCLXcQ%3D%3D
J1: "Connector", Manufacturer_Name=Molex, Datasheet Link=https://www.molex.com/en-us/products/part-detail-pdf/2200301081?display=pdf, Height=7.3mm, Manufacturer_Part_Number=2200301081
J2 J3: library part CMP-007-000048-3, "Board Connector, 2 Contact(s), 1 Row(s), Male, Straight, 0.1 inch Pitch, Solder Terminal, Black Insulator, Receptacle", Dielectric Withstanding Voltage (AC)=750V, Flammability Rating="UL94 V-0", Insulation Color=Black, Insulation Resistance=5GR, Max Operating Temperature=105°C, Min Operating Temperature=-65°C, Rated Current (Signal)=3A, Body Breadth=0.092inch, Body Depth=0.09inch, Body Length=0.184inch, Body/Shell Style=RECEPTACLE, Connector Type="BOARD CONNECTOR", Contact Finish - Mating="NOT SPECIFIED", Contact Finish - Termination="TIN LEAD OVER NICKEL", Contact Gender=Male, Contact Material=Bronze, Contact Pattern=RECTANGULAR, Contact Style="SQ PIN-SKT", Design Item ID=CMP-002-00006-7, DIN Conformance=No, Filter Feature=No, IEC Conformance=No, Insulation Material=Thermoplastic, JESD-609 Code=e0, Mating Contact Pitch=0.1inch, Mating Information="MULTIPLE MATING PARTS AVAILABLE", MIL Conformance=No, Mixed Contacts=No, Mount=Board, Mounting Style=STRAIGHT, Number Of Connectors=1, Number of Contacts=2, Number Of PCB Rows=1, Number of Rows Loaded=1, Option="General Purpose", PCB Contact Pattern=RECTANGULAR, Plating Thickness=100uin, REACH SVHC="No SVHC", Reference Standard=UL, Reliability=COMMERCIAL, RoHS Compliant=No, Source="Components - 16.09.22 - 20.27.SchLib", Terminal Length=0.12inch, Terminal Pitch=2.54mm, Termination=Solder
J4: library part CMP-007-000050-6, "Micro-Fit+ Right-Angle Header, 3.00mm Pitch, Single Row, 2 Circuits, Matte Tin (Sn) Plating, UL 94V-0, Glow-Wire Capable, Black", Manufacturer 1=Molex, Manufacturer Part Number 1=215760-1002, Number of Contacts=2, Number of Rows=1
J5: "Connector", Manufacturer_Name=SAMTEC, Mouser Part Number=200-LSHM12004LDVASK, Arrow Part Number=LSHM-120-04.0-L-DV-A-S-K-TR, Arrow Price/Stock=https://www.arrow.com/en/products/lshm-120-04.0-l-dv-a-sktr/samtec?region=nac, Datasheet Link=http://suddendocs.samtec.com/prints/lshm-1xx-xx.x-xxx-dv-a-x-x-xx-mkt.pdf, Manufacturer_Part_Number=LSHM-120-04.0-L-DV-A-S-K-TR, Mouser Price/Stock=https://www.mouser.co.uk/ProductDetail/Samtec/LSHM-120-040-L-DV-A-S-K-TR?qs=PB6%2FjmICvI1v5WBlLc04lg%3D%3D
L1: "Inductor", Manufacturer_Name=COILCRAFT, Datasheet Link=https://www.coilcraft.com/getmedia/d18b8771-c466-42ab-98b9-5b7a3721ea57/xgl3520.pdf?srsltid=AfmBOoq9-uDh3EmdFKVY7cd9_AL22AmMmwAAQ9UBadXdflM2b3sgRKIR, Height=2mm, Manufacturer_Part_Number=XGL3520-472MEC
L2: library part CMP-11268-000045-2, "Shielded Power Inductors"
MD1: library part CMP-06331-000058-1, "BLUETOOTH AUDIO MODULE"
Q1: "MOSFET (P-Channel)", Manufacturer_Name=onsemi, Mouser Part Number=512-FDC610PZ, Arrow Part Number=FDC610PZ, Arrow Price/Stock=https://www.arrow.com/en/products/fdc610pz/on-semiconductor, Datasheet Link=https://www.onsemi.com/pub/Collateral/FDC610PZ-D.PDF, Height=1.1mm, Manufacturer_Part_Number=FDC610PZ, Mouser Price/Stock=https://www.mouser.co.uk/ProductDetail/onsemi-Fairchild/FDC610PZ?qs=6olcXJbp99R1vIAdhgXLVw%3D%3D
Q2: library part CMP-07173-000101-1, "MOSFET N-CH 50V 220MA SOT-23", Case/Package=SOT-23, Continuous Drain Current (ID)=220mA, Drain to Source Breakdown Voltage=50V, Drain to Source Resistance=3.5R, Gate to Source Voltage (Vgs)=20V, Input Capacitance=27pF, Max Operating Temperature=150°C, Max Power Dissipation=360mW, Min Operating Temperature=-55°C, On-State Resistance=6R, Package Quantity=1, Threshold Voltage=1.3V, Contact Plating=Tin, Current Rating=220mA, Drain to Source Voltage (Vdss)=50V, Dual Supply Voltage=50V, Element Configuration=Single, Fall Time=9ns, Height=0.93mm, Lead Free="Lead Free", Length=2.92mm, Mount="Surface Mount", Nominal Vgs=1.3V, Number of Elements=1, Number of Pins=3, Packaging="Tape and Reel", Power Dissipation=360mW, Radiation Hardening=No, Rds On Max=3.5R, REACH SVHC="No SVHC", Rise Time=9ns, Termination=SMD/SMT, Turn-Off Delay Time=20ns, Turn-On Delay Time=2.5ns, Voltage Rating (DC)=50V, Weight=0.03g, Width=1.3mm
R1: library part CMP-Res-00031-1, "Fixed Resistor, Metal Glaze/thick Film, 0.0625W, 5000ohm, 50V, 1% +/-Tol, 100ppm/Cel, Surface Mount, 0402", Power=63mW, Resistance=5k, Tolerance=1%
R2: library part CMP-2002-07490-1, Manufacturer="Yageo / Phycomp", Part Number=RC0402FR-071ML
R3: library part CMP-03913-145532814-2, "Resistor, 18K2, 0.1W, Thick Film, 0402 Rohs Compliant: Yes", Manufacturer Lifecycle Status=ACTIVE, Max Operating Temperature=155°C, Min Operating Temperature=-55°C, Resistance=18.2kΩ, Height=350µm, Length=1mm, Lifecycle Status=Production, RoHS=Compliant, Width=500µm, YEOL="1 = Estimated lifetime > 10 years"
R4: library part CMP-03412-035751-2, "RES 182kΩ ±1% 0.063W 0402", Case Code (Imperial)=0402, Case Code (Metric)=1005, Max Operating Temperature=155°C, Max Power Dissipation=63mW, Min Operating Temperature=-55°C, Power Rating=62.5mW, Resistance=182kR, Resistor Type="Thick Film", Temperature Coefficient=100ppm/°C, Tolerance=1%, Voltage Rating=50V, Case/Package=0402, Features="Moisture Resistant", Height=0.015inch, Length=0.039inch, Number of Terminations=2, Packaging="Tape and Reel", RoHS Compliant=Yes, Series=AC, Termination=SMD/SMT, Weight=2.3E-05oz, Width=0.5mm
R5: library part CMP-2002-00433-1, Manufacturer=Panasonic, Part Number=ERJ-2GEJ103X
R6 R7: library part CMP-005-000017-1, "Fixed Resistor, Metal Glaze/thick Film, 0.1W, 1000ohm, 75V, 1% +/-Tol, 100ppm/Cel, Surface Mount, 0603", Max Operating Temperature=155°C, Min Operating Temperature=-55°C, Mount="Surface Mount", Packaging="Tape and Reel"
U1: library part CMP-202-000000-5, "Low-Cost, High-Performance Pico-Like MCU Board Based On Raspberry Pi Microcontroller RP2040", Package=Package, Check_prices=https://www.snapeda.com/parts/RP2040-ZERO/Waveshare+Electronics/view-part/?ref=eda, Component Type=Standard, Design Item ID=RP2040-ZERO, MF="Waveshare Electronics", MP=RP2040-ZERO, Pin Count=23, SnapEDA_Link=https://www.snapeda.com/parts/RP2040-ZERO/Waveshare+Electronics/view-part/?ref=snap, Source=RP2040-ZERO.SchLib
U2: library part CMP-04910-000059-1, "IC OR CTRLR IDEAL DIODE SC70-6"
U3: library part CMP-09139-000009-1, "IC REG BUCK ADJUSTABLE 2A 16LQFN", Manufacturer="Analog Devices", Max Junction Temp=+125°C, Max Supply Voltage=42V, Min Supply Voltage=3V, Nominal Supply Current=1-1.7uA, Output Current=2A, Package=LQFN-16-05-08-1516, Switching Frequency=200-2200kHz, Temperature="-40°C to +125°C", Temperature Range Low=-40°C, Automotive=No, Category=IC, ComponentLink2Description=Datasheet, ComponentLink2URL=https://www.analog.com/media/en/technical-documentation/data-sheets/LT8609S.pdf, Device Class L1="Integrated Circuits (ICs)", Device Class L2="Power Management ICs", Device Class L3="Voltage Regulators - Switching", Digikey Description="IC REG BUCK ADJUSTABLE 2A 16LQFN", Height=1.03mm, Lead Free=Yes, Manufacturer Part Number=LT8609SIV#PBF, Max Duty Cycle=100%, Mouser Description="LT8609S - 42V, 2A/3A Peak Synchronous Step-Down Regulator with 2.5µA Quiescent Current", Number of Outputs=1, Octopart=https://octopart.com/lt8609siv%23pbf-analog+devices-88316701, Output Type=AdjustableProgrammable, RoHS=TRUE, Standoff Height=0.01mm, Switching Topology=Buck, Temperature Range High=+125°C

## Free pads (board coordinates)
  round 6 hole 3.25: 2(21.1,17.35) 2(65.3,17.35) 2(65.3,59.55)

## Via types
v1: diameter 0.55, hole 0.35, Top Layer to Bottom Layer, tented both sides, 21 vias
v2: diameter 0.45, hole 0.3, Top Layer to Bottom Layer, 5 vias
v3: diameter 0.45, hole 0.3, Top Layer to Bottom Layer, tented both sides, 5 vias
v4: diameter 0.55, hole 0.35, Top Layer to Bottom Layer, 3 vias

## Nets (pads, with @x,y where several pads share a name; then routed paths per layer and width w, separated by ;. In a path a pad name is that pad's centre, name@x,y a point inside that pad or via, vN(x,y) a via of type N, cw(c..) or ccw(c..) an arc to the next point about the centre after c; other vN are vias at no path point)
3V3: C1.2 C12.1 IC1.1 IC1.2 J1.8 MD1.23 R5.2 R6.2 R7.2 U2.1
5V: C8.1 C9.2 C13.1 IC1.7 IC1.8 L2.2 R2.2 | length 1
  Top Layer w0.2: R2.2 39.598,54.203 C9.2
BCK: U1.8
CLK: U1.3
DATA: U1.4
DIN: U1.10
DT: MD1.4 U1.14
FWD: J1.5 MD1.44
GND: C1.1 C2.2 C3.1 C4.2 C5.2 C6.2 C7.2 C8.2 C10.2 C11.2 C12.2 C13.2 D1.5 D1.6 D1.7 D1.8 D3.1 IC1.5 IC1.9 J1.1 J1.2 J1.MH1 J1.MH2 J2.1 J3.1 J4.2 MD1.16 MD1.50 MD1.56 MD1.57 pad.2 Q2.2 R1.1 R3.1 R4.1 U1.22 U2.2 U2.5 U3.3 U3.4 U3.7 U3.8 U3.14 U3.17 U3.18 U3.19 U3.20 U3.21 | length 2.8
  Top Layer w0.2: v1(27.65,57.2) R1.1 ; v3(41.277,53.457) 41.344,53.457 41.538,53.65 U3.14 ; v3(42.177,51.257) 42.177,51.877 U3.18
  other v1: 48.05,58 49.45,58 50.9,58 30.9,58.7 31.7,58.7 36.3,58.7 37.1,58.7 51.675,59.4 47.125,59.45 47.95,60.8 49.35,60.8 50.8,60.8
  other v2: 43.2,52.9 44.177,52.9 43.7,53.4 43.2,53.896 44.192,53.903
  other v3: 41.477,55.257
LE: U1.5
Lock_Detect: U1.6
LRCK: U1.9
MCLK: MD1.5 U1.11
MCU_WAKE: MD1.49 U1.16
NetC2_1: C2.1 C3.2 U1.21 U2.3 U2.6
NetC5_1: C5.1 FB1.1 Q1.4
NetC6_1: C6.1 FB1.2 L1.1
NetC9_1: C9.1 R2.1 R4.2 U3.13 | length 3.9
  Top Layer w0.2: R4.2 R2.1@40.355,54.21 ; C9.1 40.355,54.203 R2.1 R2.1@40.418,54.141 ; R2.1@40.405,54.153 42.297,54.153 U3.13
NetC11_1: C11.1 U3.15 | length 2.3
  Top Layer w0.2: C11.1 40.411,52.233 40.796,52.233 41.713,53.15 U3.15
NetD1_1: D1.1 D1.2 J4.1 Q1.1 Q1.2 Q1.5 Q1.6
NetD2_1: D2.1 Q2.3
NetD2_2: D2.2 R6.1
NetD3_2: D3.2 R7.1
NetIC1_3: IC1.3 Q2.1 R5.1
NetJ2_2: J2.2 MD1.22
NetJ3_2: J3.2 MD1.31
NetL2_1: L2.1 U3.5 U3.6
NetQ1_3: Q1.3 R1.2 | length 1.5
  Top Layer w0.2: R1.2 ccw(c29.275,57.275) 29.35,57.275 Q1.3
NetR3_2: R3.2 U3.1 | length 3.9
  Top Layer w0.2: R3.2 40.377,50.607 40.527,50.457 42.319,50.457 42.95,51.087 U3.1
nRST: MD1.43 U1.17
Play/Pause: J1.7 MD1.33
"PWR (MFB)": MD1.26 U1.15
RF_PWR_EN: U1.7
RFS: MD1.2 U1.13
RWD: J1.6 MD1.38
SCLK: MD1.3 U1.12
UART_RXM: MD1.30 U1.2
UART_TXM: MD1.29 U1.1
V_In: C4.1 C7.1 L1.2 U3.9 U3.10 U3.11
  other v1: 43.3,56.2 43.3,57.1 42.95,57.85 44.25,58 42.05,58.1 39.3,58.35 40.25,58.35 41.2,58.35
  other v4: 43.1,59.4 44.2,59.4 45.3,59.4
VCC: C10.1 U3.2 U3.16 | length 6.7
  Top Layer w0.2: v3(41.277,51.357) 41.307,51.386 41.307,51.882 42.075,52.65 U3.16 ; v3(42.752,49.857) 43.301,49.857 C10.1 ; C10.1@43.45,50.106 U3.2
  Signals w0.2: v3(41.277,51.357) 41.277,51.344 42.752,49.869 v3(42.752,49.857)
Vol_DWN: J1.4 MD1.40
Vol_UP: J1.3 MD1.39
pads on no net: D1.3 D1.4 IC1.4 IC1.6 J4.3 J5.1 J5.2 J5.3 J5.4 J5.5 J5.6 J5.7 J5.8 J5.9 J5.10 J5.11 J5.12 J5.13 J5.14 J5.15 J5.16 J5.17 J5.18 J5.19 J5.20 J5.21 J5.22 J5.23 J5.24 J5.25 J5.26 J5.27 J5.28 J5.29 J5.30 J5.31 J5.32 J5.33 J5.34 J5.35 J5.36 J5.37 J5.38 J5.39 J5.40 J5.41 J5.42 J5.43 J5.44 MD1.1 MD1.6 MD1.7 MD1.8 MD1.9 MD1.10 MD1.11 MD1.12 MD1.13 MD1.14 MD1.15 MD1.17 MD1.18 MD1.19 MD1.20 MD1.21 MD1.24 MD1.25 MD1.27 MD1.28 MD1.32 MD1.34 MD1.35 MD1.36 MD1.37 MD1.41 MD1.42 MD1.45 MD1.46 MD1.47 MD1.48 U1.18 U1.19 U1.20 U1.23 U2.4 U3.12

## Polygon pours and split planes (outlines as drawn)
V_In on Top Layer "V_IN_L01_P019" (solid, pour order 19): 44.6,54.45 44.6,57.859 cw(c44.941,57.859) 44.7,58.1 44.909,58.309 cw(c45.25,57.967) 45.25,58.45 46,58.45 ccw(c46,58.5) 46.05,58.5 46.05,60.3 ccw(c45.95,60.3) 45.95,60.4 42.49,60.4 ccw(c42.49,59.542) 41.883,60.149 cw(c41.524,60.508) 41.524,60 38.9,60 ccw(c38.9,59.7) 38.6,59.7 38.6,58.641 ccw(c38.941,58.641) 38.7,58.4 39.044,58.056 ccw(c39.3,58.312) 39.3,57.95 41.31,57.95 cw(c41.31,57.181) 41.854,57.725 42.682,56.897 cw(c42.035,56.25) 42.95,56.25 ccw(c43.554,56.25) 43.127,55.823 43.2,55.75 cw(c42.959,55.509) 43.3,55.509 43.3,54.45
NetC6_1 on Top Layer "NETC6_1_L01_P013" (solid, pour order 13): 33.5,61.1 33.5,63.3 cw(c33.55,63.3) 33.55,63.35 41.8,63.35 ccw(c41.8,63.45) 41.9,63.45 cw(c41.417,62.967) 42.1,62.967 42.1,61.125
GND on Top Layer "GND_L01_P012" (solid, pour order 12): 36.036,59.95 ccw(c36.036,59.719) 35.805,59.719 35.805,58.778 ccw(c36.283,58.778) 36.283,58.3 37.133,58.3 ccw(c37.133,58.7) 37.533,58.7 37.533,59.75 ccw(c37.333,59.75) 37.333,59.95
NetC6_1 on Top Layer "NETC6_1_L01_P011" (solid, pour order 11): 33.574,59.769 37.372,59.769 ccw(c37.372,60.728) 38.05,60.05 38.303,60.303 cw(c38.9,59.705) 38.9,60.55 41.8,60.55 ccw(c41.8,60.85) 42.1,60.85 42.1,61.4 ccw(c41.75,61.4) 41.75,61.75 34.15,61.75 ccw(c34.15,61.1) 33.5,61.1
GND on Top Layer "GND_L01_P009" (solid, pour order 9): 30.653,60 ccw(c30.653,59.769) 30.422,59.769 30.422,58.828 ccw(c30.9,58.828) 30.9,58.35 31.75,58.35 ccw(c31.75,58.75) 32.15,58.75 32.15,59.8 ccw(c31.95,59.8) 31.95,60
NetC5_1 on Top Layer "NETC5_1_L01_P001" (solid, pour order 1): 28.598,63.859 28.598,60.069 ccw(c28.898,60.069) 28.898,59.769 33.469,59.769 ccw(c33.469,60.298) 33.998,60.298 33.998,63.559 ccw(c33.598,63.559) 33.598,63.959
NetD1_1 on Top Layer "NETD1_1_L01_P000" (solid, pour order 0): 24,60.404 ccw(c24.6,60.404) 24.6,59.804 cw(c24.6,58.356) 25.624,59.38 26.97,58.034 ccw(c27.525,58.589) 27.525,57.804 28.3,57.804 ccw(c28.3,58.304) 28.8,58.304 28.8,63.104 ccw(c28.1,63.104) 28.1,63.804 24.5,63.804 ccw(c24.5,63.304) 24,63.304
GND on GND "NONET_L02_P002" (solid, shelved, pour order 2): 20.9,70.9 2.54,70.9 ccw(c2.54,68.36) 0,68.36 0,10.64 ccw(c2.54,10.64) 2.54,8.1 72.7,8.1 ccw(c72.7,8.8) 73.4,8.8 73.4,69.36 ccw(c70.86,69.36) 70.86,71.9 54.5,71.9
V_In on Bottom Layer "V_IN_L04_P020" (solid, pour order 20): 42.49,60.4 ccw(c42.49,59.542) 41.883,60.149 cw(c41.524,60.508) 41.524,60 38.84,60 ccw(c38.84,59.76) 38.6,59.76 38.6,58.608 ccw(c38.86,58.608) 38.676,58.424 39.069,58.031 ccw(c39.264,58.226) 39.264,57.95 41.31,57.95 cw(c41.31,57.181) 41.854,57.725 42.64,56.939 cw(c41.892,56.191) 42.95,56.191 ccw(c43.347,56.191) 43.347,55.793 44.239,55.793 ccw(c44.239,56.154) 44.6,56.154 44.6,57.859 cw(c44.941,57.859) 44.7,58.1 44.909,58.309 cw(c45.25,57.967) 45.25,58.45 46.01,58.45 ccw(c46.01,58.49) 46.05,58.49 46.05,60.32 ccw(c45.97,60.32) 45.97,60.4
GND on Bottom Layer "GND_L04_P007" (solid, pour order 7): 24.45,58.1 cw(c25.4,58.1) 25.4,59.05 25.714,59.05 ccw(c25.714,60.586) 26.8,59.5 27.116,59.816 cw(c27.568,59.363) 27.568,60.003 28.833,60.003 cw(c28.833,59.784) 29.052,59.784 29.052,58.602 cw(c28.75,58.602) 28.75,58.3 28.438,58.3 ccw(c28.438,56.967) 27.496,57.91 27.43,57.844 cw(c25.634,59.64) 25.634,57.1 25.3,57.1 cw(c25.3,57.95) 24.45,57.95
NetD1_1 on Bottom Layer "NETD1_1_L04_P005" (solid, pour order 5): 24.69,61.975 ccw(c24.69,61.675) 24.39,61.675 24.39,60.525 ccw(c24.79,60.525) 24.79,60.125 28.14,60.125 ccw(c28.14,60.175) 28.19,60.175 28.19,60.413 ccw(c27.678,60.413) 28.04,60.775 27.087,61.728 ccw(c26.49,61.13) 26.49,61.975

## Silkscreen, mask and mechanical layers (free items; w line width, h text height)
Top Overlay:
  lines w0.125: 30.15,57 42.701,57 43.7,57.999 43.7,62.7 30.15,62.7 ; 35.85,57 35.85,55 30.15,55 ; 30.15,55 18.05,55 18.05,59.6 cw(c21.144,59.6) 21.144,62.695 30.15,62.7 ; 30.15,55 30.15,59.9 30.15,62.7
  text "FLTR ^" at 30.785,55.635 h0.8
  text "12V_IN + / Protection" at 18.25,55.1 h0.8
Board Shape:
  the board outline again, w0.254

## Dimensions
17.55,59.55 to 68.85,59.55 on Board Shape